# EAGLE board r (EAGLE 7.1.0)
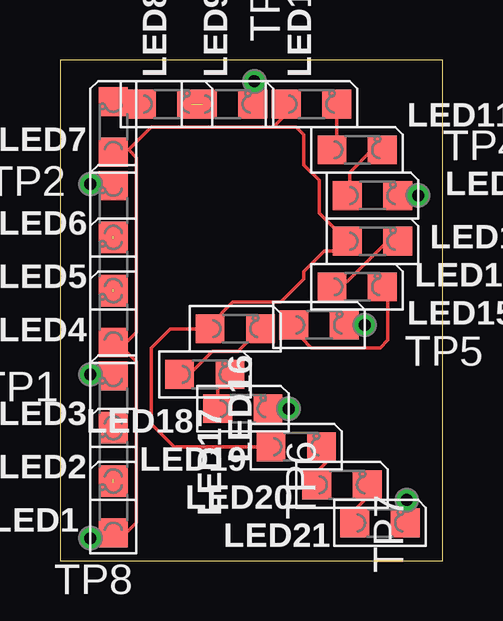
[diagram p0: board, top side]

Size 15.94 x 20.89 mm. Coordinates in mm from the lower left corner, seen from the top.
Outline: 0,0 15.94,0 15.94,20.89 0,20.89 0,0
Copper layers (1*16): Top 0.035mm / dielectric 1.5mm / Bottom 0.035mm
Design rules "Fusion_eagle_rule_v1.1_tms *": minimum track width 6mil, minimum drill 12mil, track to track 6mil, track to pad 6mil, pad to pad 6mil, via to via 6mil, smd to smd 0mil, copper to edge 10mil, drill to drill 10mil, minimum pad ring 10mil, minimum via ring 6mil, stop-mask expansion 2mil, vias tented up to drill 100mil, thermal gap 10mil

## Footprints (pad centres in the part's own frame; a part is rotated, then mirrored left to right if it is on the bottom)
LED_0805 = smd 1.2 x 1.2: A 0,-1.05; C 0,1.05
P1-20 = drill 0.5: TP 0,0

## Placement (x,y rotation side)
LED1  [LED_0805]  2.22,2.22 0 top
LED2  [LED_0805]  2.22,4.45 0 top
LED3  [LED_0805]  2.22,6.67 0 top
LED4  [LED_0805]  2.22,10.16 0 top
LED5  [LED_0805]  2.22,12.38 0 top
LED6  [LED_0805]  2.22,14.61 0 top
LED7  [LED_0805]  2.22,18.1 0 top
LED8  [LED_0805]  4.45,19.05 270 top
LED9  [LED_0805]  6.99,19.05 270 top
LED10  [LED_0805]  10.48,19.05 270 top
LED11  [LED_0805]  12.38,17.15 270 top
LED12  [LED_0805]  13.02,15.24 270 top
LED13  [LED_0805]  13.02,13.34 270 top
LED14  [LED_0805]  12.38,11.43 270 top
LED15  [LED_0805]  10.79,9.84 270 top
LED16  [LED_0805]  7.3,9.68 270 top
LED17  [LED_0805]  6.03,7.78 270 top
LED18  [LED_0805]  7.62,6.35 270 top
LED19  [LED_0805]  9.84,4.76 270 top
LED20  [LED_0805]  11.75,3.18 270 top
LED21  [LED_0805]  13.34,1.59 270 top
TP1  [P1-20]  1.27,7.78 0 top
TP2  [P1-20]  1.27,15.72 0 top
TP3  [P1-20]  8.1,20 0 top
TP4  [P1-20]  14.92,15.24 0 top
TP5  [P1-20]  12.7,9.84 0 top
TP6  [P1-20]  9.53,6.35 0 top
TP7  [P1-20]  14.45,2.54 0 top
TP8  [P1-20]  1.27,0.95 0 top

## Library data of the parts
LED1-LED21 TP1-TP8 = CyberRailGuru

## Nets
N$51: LED2.C LED3.A
N$52: LED1.C LED2.A
N$53: LED5.C LED6.A
N$54: LED4.C LED5.A
N$55: LED8.C LED9.A
N$56: LED7.C LED8.A
N$57: LED11.C LED12.A
N$58: LED10.C LED11.A
N$59: LED14.C LED15.A
N$60: LED13.C LED14.A
N$61: LED17.C LED18.A
N$62: LED16.C LED17.A
N$63: LED20.C LED21.A
N$64: LED19.C LED20.A
VIN5: LED1.A LED4.A LED7.A LED10.A LED13.A LED16.A LED19.A TP8.TP
VOUT26: LED3.C TP1.TP
VOUT27: LED6.C TP2.TP
VOUT28: LED9.C TP3.TP
VOUT29: LED12.C TP4.TP
VOUT30: LED15.C TP5.TP
VOUT31: LED18.C TP6.TP
VOUT32: LED21.C TP7.TP

## Tracks (layer width: path | path; a pad name or v marks a point on that pad's centre or on a via)
N$51  (1 unrouted)
N$52  (1 unrouted)
N$53  (1 unrouted)
N$54  (1 unrouted)
N$55  (1 unrouted)
N$56
  Top 0.152: LED8.A 2.32,19.05 LED7.C
N$57
  Top 0.152: LED11.C 13.02,17.15 12.06,16.19 12.06,15.34 LED12.A
N$58
  Top 0.152: LED10.C 11.53,17.34 LED11.A
N$59
  Top 0.152: LED15.A 10.06,9.31 10.48,8.89 13.34,8.89 13.65,9.21 13.65,11.21 LED14.C
N$60
  Top 0.152: LED13.C 13.65,13.34 11.97,11.65 LED14.A
N$61
  Top 0.152: LED18.A 6.57,7.43 LED17.C
N$62
  Top 0.152: LED17.A 5.56,7.94 6.35,8.73 7.4,8.73 LED16.C
N$63
  Top 0.152: LED21.A 12.29,2.13 12.7,2.54 12.7,3.4 LED20.C
N$64
  Top 0.152: LED20.A 10.7,3.71 11.11,4.13 11.11,4.86 LED19.C
VIN5
  Top 0.152: TP8.TP 2.22,0.95 LED1.A 2.76,1.17 3.17,1.59 3.17,8.32 2.38,9.11 LED4.A 2.76,9.11 3.17,9.53 3.17,16.83 2.86,17.15 | 2.86,17.15 2.32,17.15 LED7.A | LED10.A 9.43,18.64 8.89,18.1 | 8.89,18.1 3.81,18.1 2.86,17.15 | 8.89,18.1 9.84,18.1 10.16,17.78 10.16,16.51 10.79,15.88 10.79,14.51 LED13.A 11.97,12.92 11.02,12.92 10.16,12.07 10.16,11.75 9.21,10.8 7.21,10.8 6.25,9.84 LED16.A 4.6,9.68 3.81,8.89 3.81,5.72 4.76,4.76 LED19.A
VOUT26
  Top 0.152: TP1.TP 2.22,7.78 LED3.C
VOUT27
  Top 0.152: TP2.TP 2.22,15.72 LED6.C
VOUT28
  Top 0.152: TP3.TP 8.04,20 LED9.C
VOUT29
  Top 0.152: TP4.TP LED12.C
VOUT30
  Top 0.152: TP5.TP LED15.C
VOUT31
  Top 0.152: TP6.TP LED18.C
VOUT32
  Top 0.152: TP7.TP 14.45,1.97 LED21.C

## Text on the board
201bmp: R